# EAGLE board panelizada (EAGLE 7.2.0)
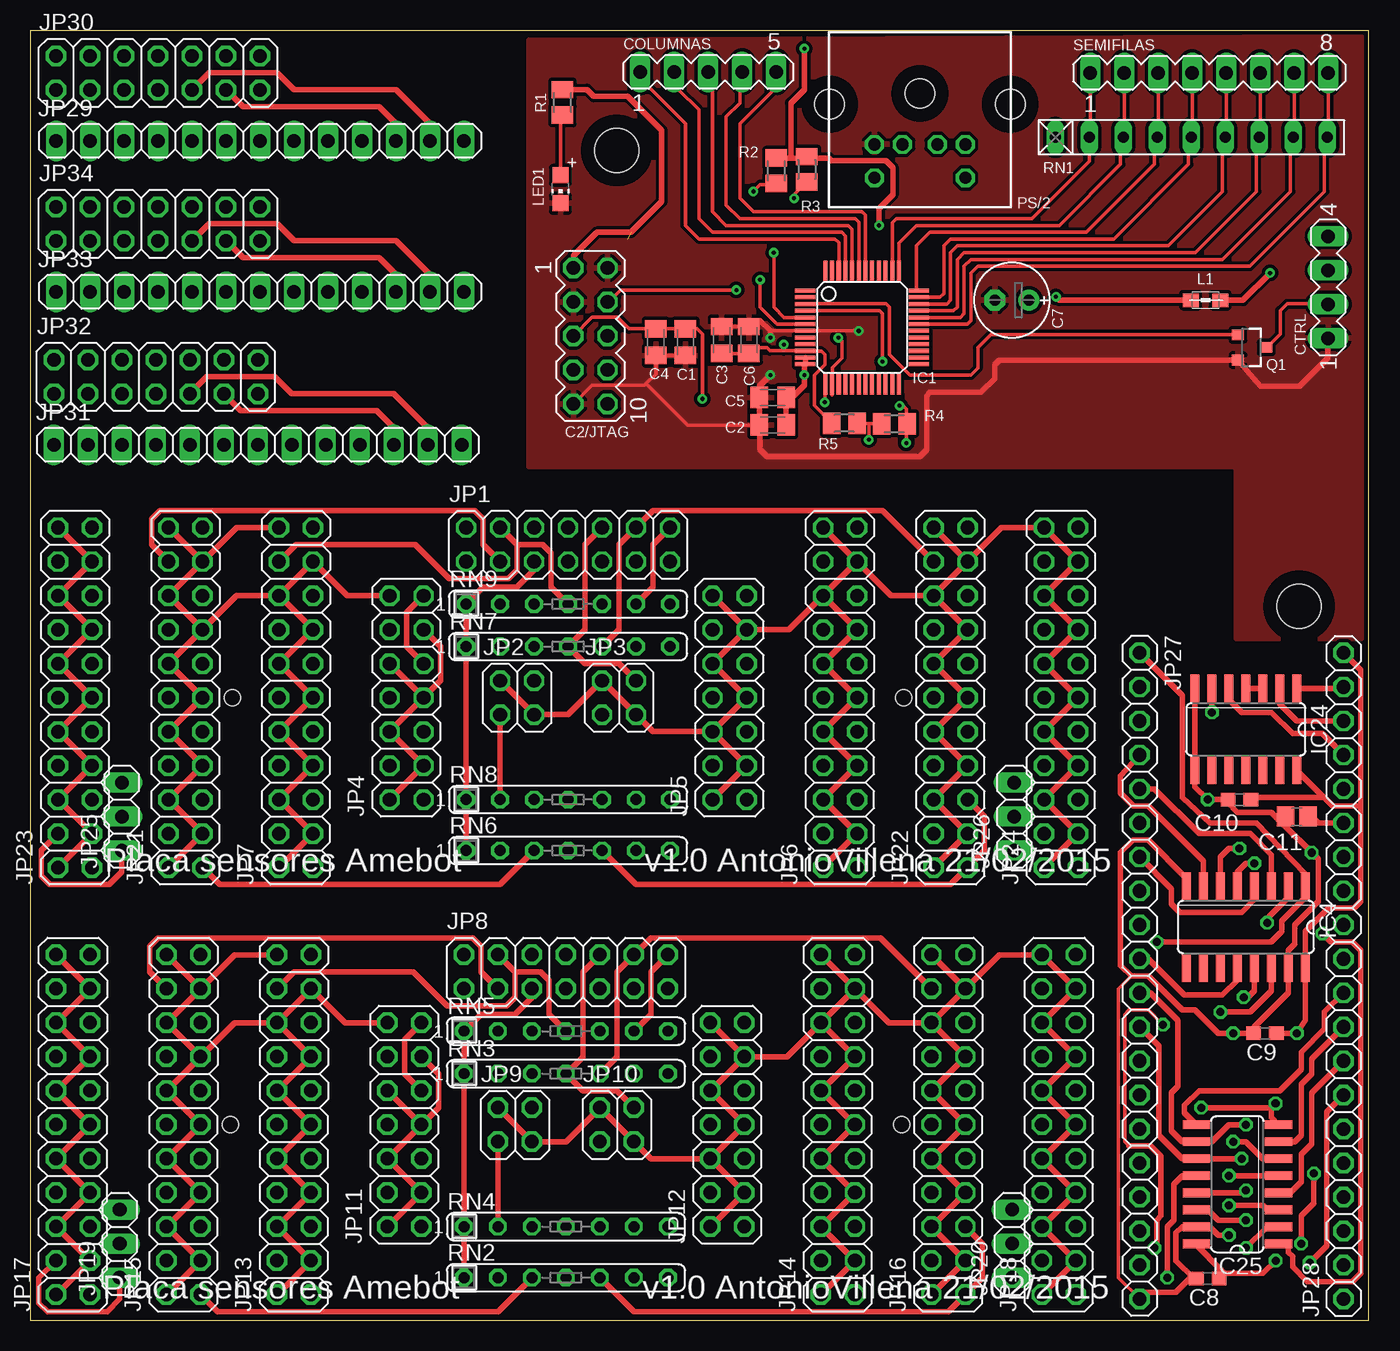
[diagram p0: board, top side]
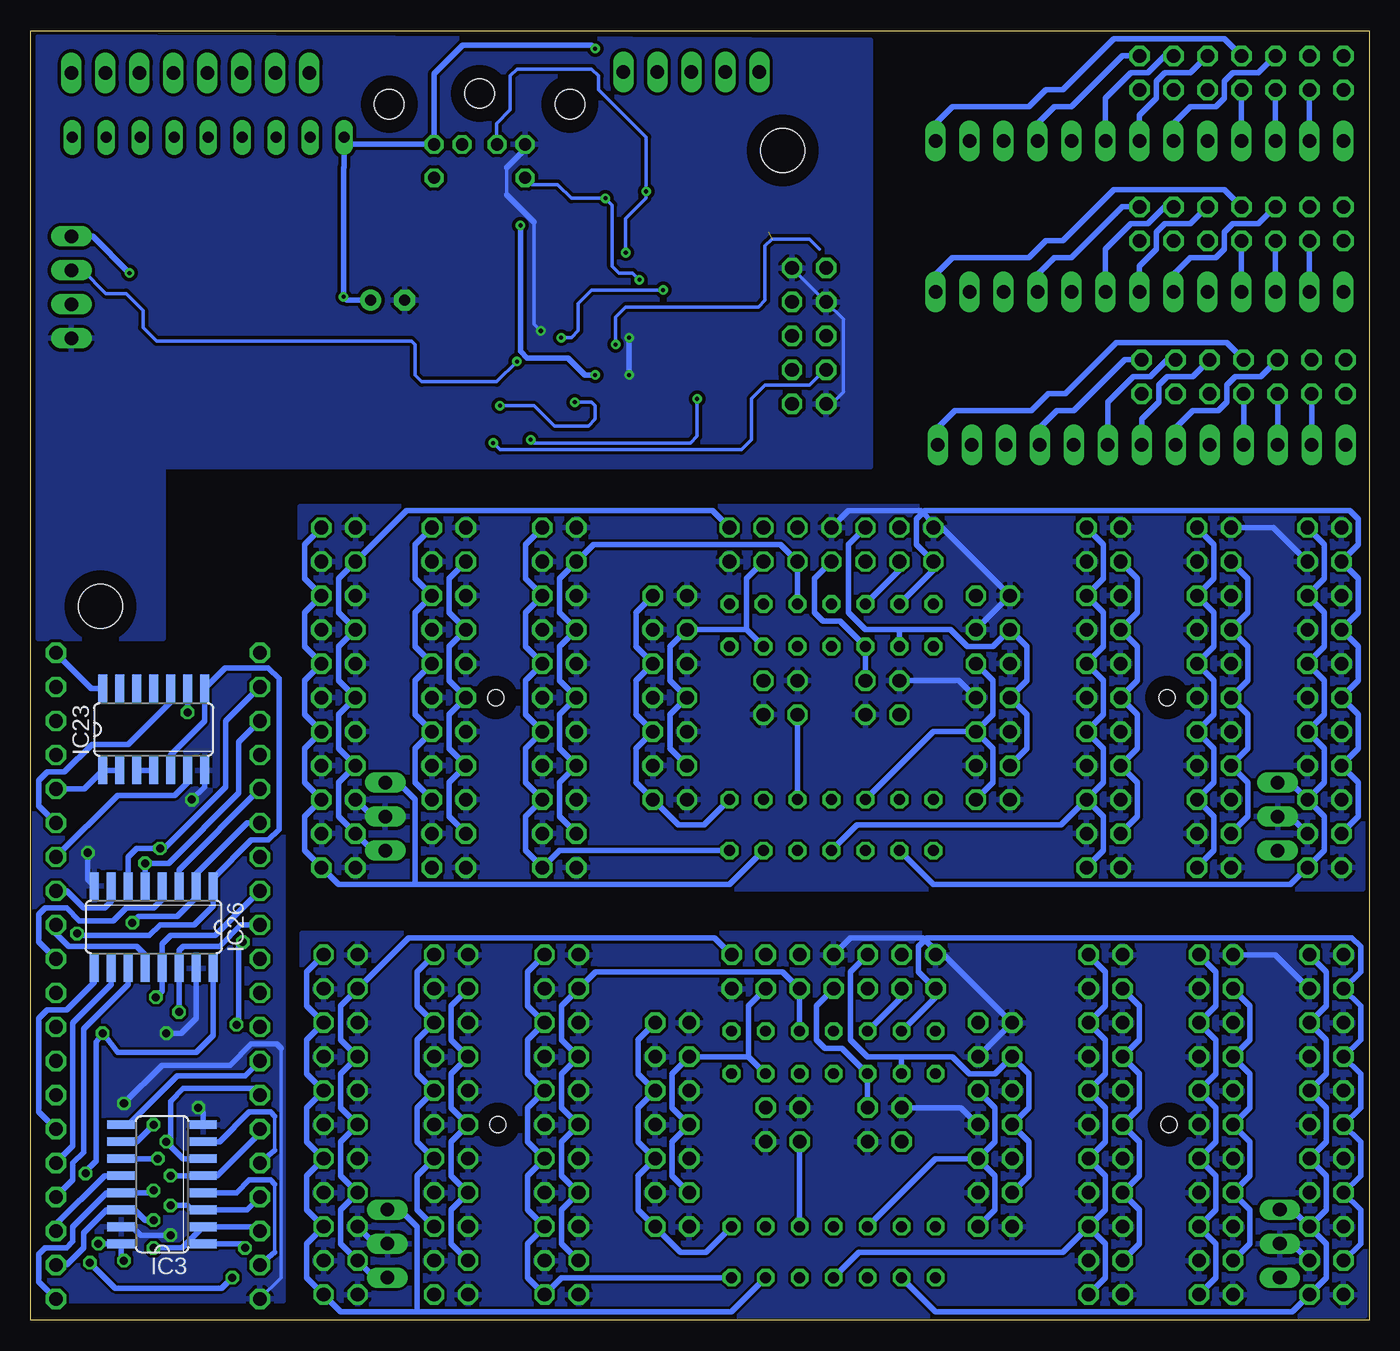
[diagram p1: board, bottom side, seen from below]

No outline drawn. Coordinates in mm, seen from the top.
Copper layers (1*16): Top 0.035mm / dielectric 1.5mm / Bottom 0.035mm
Design rules "default": minimum track width 10mil, minimum drill 24mil, track to track 8mil, track to pad 8mil, pad to pad 8mil, via to via 8mil, smd to smd 8mil, copper to edge 40mil, drill to drill 8mil, minimum pad ring 10mil, minimum via ring 8mil, stop-mask expansion 4mil, vias tented up to drill 0mil, thermal gap 10mil
Net classes: 1 power: width 0.508 mm, clearance 0.254 mm to class 0, clearance 0.254 mm
Holes 3.3 mm at 43.8,87.4 94.77,53.34
Holes 1.2 mm at 14.92,14.61 65.09,14.61 15.08,46.51 65.25,46.51
Milling: 4 lines

## Footprints (pad centres in the part's own frame; a part is rotated, then mirrored left to right if it is on the bottom)
C0805K = smd 1.3 x 1.6: 1 -1,0; 2 1,0
MA05-2 = drill 1.016 octagon: 1 -5.08,-1.27; 2 -5.08,1.27; 3 -2.54,-1.27; 4 -2.54,1.27; 5 0,-1.27; 6 0,1.27; 7 2.54,-1.27; 8 2.54,1.27; 9 5.08,-1.27; 10 5.08,1.27
E2,5-6E = drill 0.813 pad 1.575: + -1.27,0 | drill 0.813 pad 1.575 octagon: - 1.27,0
C0603 = smd 1.1 x 1: 1 -0.85,0; 2 0.85,0
C0805 = smd 1.3 x 1.5: 1 -0.85,0; 2 0.85,0
MA05-1 = drill 1.016 long: 1 -5.08,0; 2 -2.54,0; 3 0,0; 4 2.54,0; 5 5.08,0
MA04-1 = drill 1.016 long: 1 -3.81,0; 2 -1.27,0; 3 1.27,0; 4 3.81,0
TQFP48 = smd 0.3 x 1.5: 1 -2.75,-4.25; 2 -2.25,-4.25; 3 -1.75,-4.25; 4 -1.25,-4.25; 5 -0.75,-4.25; 6 -0.25,-4.25; 7 0.25,-4.25; 8 0.75,-4.25; 9 1.25,-4.25; 10 1.75,-4.25; 11 2.25,-4.25; 12 2.75,-4.25; 25 2.75,4.25; 26 2.25,4.25; 27 1.75,4.25; 28 1.25,4.25; 29 0.75,4.25; 30 0.25,4.25; 31 -0.25,4.25; 32 -0.75,4.25; 33 -1.25,4.25; 34 -1.75,4.25; 35 -2.25,4.25; 36 -2.75,4.25 | smd 1.5 x 0.3: 13 4.25,-2.75; 14 4.25,-2.25; 15 4.25,-1.75; 16 4.25,-1.25; 17 4.25,-0.75; 18 4.25,-0.25; 19 4.25,0.25; 20 4.25,0.75; 21 4.25,1.25; 22 4.25,1.75; 23 4.25,2.25; 24 4.25,2.75; 37 -4.25,2.75; 38 -4.25,2.25; 39 -4.25,1.75; 40 -4.25,1.25; 41 -4.25,0.75; 42 -4.25,0.25; 43 -4.25,-0.25; 44 -4.25,-0.75; 45 -4.25,-1.25; 46 -4.25,-1.75; 47 -4.25,-2.25; 48 -4.25,-2.75
SO16 = smd 0.66 x 2.032: 1 -4.445,-3.073; 2 -3.175,-3.073; 3 -1.905,-3.073; 4 -0.635,-3.073; 5 0.635,-3.073; 6 1.905,-3.073; 7 3.175,-3.073; 8 4.445,-3.073; 9 4.445,3.073; 10 3.175,3.073; 11 1.905,3.073; 12 0.635,3.073; 13 -0.635,3.073; 14 -1.905,3.073; 15 -3.175,3.073; 16 -4.445,3.073
SO14 = smd 0.66 x 2.032: 1 -3.81,-3.073; 2 -2.54,-3.073; 3 -1.27,-3.073; 4 0,-3.073; 5 1.27,-3.073; 6 2.54,-3.073; 7 3.81,-3.073; 8 3.81,3.073; 9 2.54,3.073; 10 1.27,3.073; 11 0,3.073; 12 -1.27,3.073; 13 -2.54,3.073; 14 -3.81,3.073
2X07 = drill 1.016 octagon: 1 -7.62,-1.27; 2 -7.62,1.27; 3 -5.08,-1.27; 4 -5.08,1.27; 5 -2.54,-1.27; 6 -2.54,1.27; 7 0,-1.27; 8 0,1.27; 9 2.54,-1.27; 10 2.54,1.27; 11 5.08,-1.27; 12 5.08,1.27; 13 7.62,-1.27; 14 7.62,1.27
2X02 = drill 1.016 octagon: 1 -1.27,-1.27; 2 -1.27,1.27; 3 1.27,-1.27; 4 1.27,1.27
2X11 = drill 1.016 octagon: 1 -12.7,-1.27; 2 -12.7,1.27; 3 -10.16,-1.27; 4 -10.16,1.27; 5 -7.62,-1.27; 6 -7.62,1.27; 7 -5.08,-1.27; 8 -5.08,1.27; 9 -2.54,-1.27; 10 -2.54,1.27; 11 0,-1.27; 12 0,1.27; 13 2.54,-1.27; 14 2.54,1.27; 15 5.08,-1.27; 16 5.08,1.27; 17 7.62,-1.27; 18 7.62,1.27; 19 10.16,-1.27; 20 10.16,1.27; 21 12.7,-1.27; 22 12.7,1.27
1X03 = drill 1.016 long: 1 -2.54,0; 2 0,0; 3 2.54,0
1X20 = drill 1.016 octagon: 1 -24.13,0; 2 -21.59,0; 3 -19.05,0; 4 -16.51,0; 5 -13.97,0; 6 -11.43,0; 7 -8.89,0; 8 -6.35,0; 9 -3.81,0; 10 -1.27,0; 11 1.27,0; 12 3.81,0; 13 6.35,0; 14 8.89,0; 15 11.43,0; 16 13.97,0; 17 16.51,0; 18 19.05,0; 19 21.59,0; 20 24.13,0
1X13 = drill 1.016 long: 1 -15.24,0; 2 -12.7,0; 3 -10.16,0; 4 -7.62,0; 5 -5.08,0; 6 -2.54,0; 7 0,0; 8 2.54,0; 9 5.08,0; 10 7.62,0; 11 10.16,0; 12 12.7,0; 13 15.24,0
0805 = smd 1.2 x 1: 1 -1.1,0; 2 1.1,0
CHIP-LED0805 = smd 1.2 x 1.2: A 0,-1.05; C 0,1.05
SSV-BC06 = drill 0.9 octagon: 1 1.3,8.5; 2 -1.3,8.5; 3 3.4,8.5; 4 -3.4,8.5; 5 3.4,11; 6 -3.4,11 | hole 2.2: -6.75,5.5; 0,4.7; 6.75,5.5
SOT23-3 = smd 0.8 x 0.9: 1 -0.95,-1; 2 0.95,-1; 3 0,1.1
M0805 = smd 1.3 x 1.6: 1 -0.95,0; 2 0.95,0
RN-9 = drill 0.813 long: 1 -10.16,0; 2 -7.62,0; 3 -5.08,0; 4 -2.54,0; 5 0,0; 6 2.54,0; 7 5.08,0; 8 7.62,0; 9 10.16,0
SIL7 = drill 0.813 octagon: 1 -7.62,0; 2 -5.08,0; 3 -2.54,0; 4 0,0; 5 2.54,0; 6 5.08,0; 7 7.62,0
MA08-1 = drill 1.016 long: 1 -8.89,0; 2 -6.35,0; 3 -3.81,0; 4 -1.27,0; 5 1.27,0; 6 3.81,0; 7 6.35,0; 8 8.89,0

## Placement (x,y rotation side)
C1  100nF  [C0805K]  48.93,73.08 270 top
C2  100nF  [C0805K]  55.45,66.88 180 top
C2/JTAG  [MA05-2]  41.84,73.54 270 top
C3  100nF  [C0805K]  51.64,73.23 90 top
C4  1uF  [C0805K]  46.72,73.08 270 top
C5  1uF  [C0805K]  55.45,68.94 180 top
C6  1uF  [C0805K]  53.68,73.23 90 top
C7  100uF  [E2,5-6E]  73.31,76.2 180 top
C8  [C0603]  87.95,3.11 180 top
C9  [C0603]  92.23,21.43 180 top
C10  100n  [C0603]  90.33,38.89 180 top
C11  [C0805]  94.61,37.62 180 top
COLUMNAS  [MA05-1]  50.63,93.27 0 top
CTRL  [MA04-1]  96.96,77.17 90 top
IC1  C8051F340  [TQFP48]  62.13,74.17 270 top
IC3  74*157  [SO16]  90.17,10.16 90 bottom
IC4  74*157  [SO16]  90.81,29.37 180 top
IC23  74LS32D  [SO14]  90.81,44.13 0 bottom
IC24  74LS00D  [SO14]  90.81,44.13 180 top
IC25  74*157  [SO16]  90.17,10.16 90 top
IC26  74*157  [SO16]  90.81,29.37 180 bottom
JP1  [2X07]  40.16,57.94 0 top
JP2  [2X02]  36.35,46.51 0 top
JP3  [2X02]  43.97,46.51 0 top
JP4  [2X07]  28.1,46.51 90 top
JP5  [2X07]  52.23,46.51 90 top
JP6  [2X11]  60.48,46.51 90 top
JP7  [2X11]  19.84,46.51 90 top
JP8  [2X07]  40.01,26.04 0 top
JP9  [2X02]  36.2,14.61 0 top
JP10  [2X02]  43.81,14.61 0 top
JP11  [2X07]  27.94,14.61 90 top
JP12  [2X07]  52.07,14.61 90 top
JP13  [2X11]  19.68,14.61 90 top
JP14  [2X11]  60.33,14.61 90 top
JP15  [2X11]  11.43,14.61 90 top
JP16  [2X11]  68.58,14.61 90 top
JP17  [2X11]  3.17,14.61 90 top
JP18  [2X11]  76.83,14.61 90 top
JP19  [1X03]  6.67,5.71 90 top
JP20  [1X03]  73.34,5.71 90 top
JP21  [2X11]  11.59,46.51 90 top
JP22  [2X11]  68.74,46.51 90 top
JP23  [2X11]  3.33,46.51 90 top
JP24  [2X11]  76.99,46.51 90 top
JP25  [1X03]  6.83,37.62 90 top
JP26  [1X03]  73.5,37.62 90 top
JP27  [1X20]  82.87,25.72 270 top
JP28  [1X20]  98.11,25.72 90 top
JP29  [1X13]  17.14,88.11 0 top
JP30  [2X07]  9.53,93.19 0 top
JP31  [1X13]  16.99,65.41 0 top
JP32  [2X07]  9.37,70.48 0 top
JP33  [1X13]  17.14,76.83 0 top
JP34  [2X07]  9.53,81.92 0 top
L1  [0805]  87.79,76.2 180 top
LED1  [CHIP-LED0805]  39.59,84.49 180 top
PS/2  [SSV-BC06]  66.45,96.34 180 top
Q1  2N2222  [SOT23-3]  91.22,72.67 270 top
R1  470  [M0805]  39.74,90.98 270 top
R2  10K  [M0805]  55.72,85.87 90 top
R3  10K  [M0805]  58.01,85.98 90 top
R4  1K  [M0805]  64.55,66.98 180 top
R5  1K  [M0805]  60.81,67.02 0 top
RN1  [RN-9]  86.74,88.37 0 top
RN2  [SIL7]  40.01,3.17 0 top
RN3  [SIL7]  40.01,18.41 0 top
RN4  [SIL7]  40.01,6.99 0 top
RN5  [SIL7]  40.01,21.59 0 top
RN6  [SIL7]  40.16,35.08 0 top
RN7  [SIL7]  40.16,50.32 0 top
RN8  [SIL7]  40.16,38.89 0 top
RN9  [SIL7]  40.16,53.5 0 top
SEMIFILAS  [MA08-1]  88.07,93.19 0 top

## Library data of the parts
C1-C11 R1-R5 = rcl
C2/JTAG COLUMNAS CTRL SEMIFILAS = con-lstb
IC1 = silabs-2
IC3 IC4 IC23-IC26 = 74xx-eu
JP1-JP34 = pinhead
L1 = wuerth-elektronik
LED1 = adafruit
PS/2 = con-yamaichi
Q1 = SparkFun
RN1 = resistor-net
RN2-RN9 = resistor-sil; OC_FARNELL: unknown; OC_NEWARK: unknown

## Nets
3.3V: JP8.5 RN2.1 RN3.1 RN4.1 RN5.1
3.3V1: JP1.5 RN6.1 RN7.1 RN8.1 RN9.1
3A: IC26.11 JP28.4
3B: IC26.10 JP28.5
5VDC [power]: C2.1 C5.1 C7.+ IC1.11 IC1.12 L1.2 PS/2.4 R2.2 R3.2 RN1.1
A0: IC4.6 IC26.6 JP27.2
A1: IC4.3 IC26.3 JP27.5
A2: IC4.13 IC26.13 JP27.8
A3: IC3.10 IC25.10 JP27.11
A4: IC3.6 IC25.6 JP27.14
A5: IC3.3 IC25.3 JP27.17
A6: IC3.13 IC25.13 JP28.1
A7: IC4.5 IC26.5 JP27.3
A8: IC4.2 IC26.2 JP27.6
A9: IC4.14 IC26.14 JP27.9
A10: IC3.11 IC25.11 JP27.12
A11: IC3.5 IC25.5 JP27.15
A12: IC3.2 IC25.2 JP27.18
A13: IC3.14 IC25.14 JP28.2
A15: IC24.5 JP28.17
CASL: IC23.6 JP28.14
D0: COLUMNAS.1 IC1.46
D1: COLUMNAS.2 IC1.45
D2: COLUMNAS.3 IC1.44
D3: COLUMNAS.4 IC1.43
D4: COLUMNAS.5 IC1.42
DMA0: IC4.7 JP27.4
DMA1: IC4.4 JP27.7
DMA2: IC4.12 JP27.10
DMA3: IC3.9 JP27.13
DMA4: IC3.7 JP27.16
DMA5: IC3.4 JP27.19
DMA6: IC3.12 JP28.3
DRASLL: IC3.1 IC4.1 JP27.1
GND: JP1.2 JP1.8 JP1.13 JP2.2 JP2.3 JP3.2 JP3.3 JP4.2 JP4.3 JP4.6 JP4.7 JP4.10 JP4.11 JP4.14 JP5.2 JP5.3 JP5.6 JP5.7 JP5.10 JP5.11 JP5.14 JP6.2 JP6.3 JP6.6 JP6.7 JP6.10 JP6.11 JP6.14 JP6.15 JP6.18 JP6.19 JP6.22 JP7.2 JP7.3 JP7.6 JP7.7 JP7.10 JP7.11 JP7.14 JP7.15 JP7.18 JP7.19 JP7.22 JP21.2 JP21.3 JP21.6 JP21.7 JP21.10 JP21.11 JP21.14 JP21.15 JP21.18 JP21.19 JP21.22 JP22.2 JP22.3 JP22.6 JP22.7 JP22.10 JP22.11 JP22.14 JP22.15 JP22.18 JP22.19 JP22.22 JP23.2 JP23.3 JP23.6 JP23.7 JP23.10 JP23.11 JP23.14 JP23.15 JP23.18 JP23.19 JP23.22 JP24.2 JP24.3 JP24.6 JP24.7 JP24.10 JP24.11 JP24.14 JP24.15 JP24.18 JP24.19 JP24.22 JP25.2 JP26.2
GND1 [power]: C1.2 C2.2 C2/JTAG.2 C2/JTAG.3 C2/JTAG.9 C3.2 C4.2 C5.2 C6.2 C7.- CTRL.1 IC1.7 LED1.C PS/2.3 Q1.2
GND2: JP8.2 JP8.8 JP8.13 JP9.2 JP9.3 JP10.2 JP10.3 JP11.2 JP11.3 JP11.6 JP11.7 JP11.10 JP11.11 JP11.14 JP12.2 JP12.3 JP12.6 JP12.7 JP12.10 JP12.11 JP12.14 JP13.2 JP13.3 JP13.6 JP13.7 JP13.10 JP13.11 JP13.14 JP13.15 JP13.18 JP13.19 JP13.22 JP14.2 JP14.3 JP14.6 JP14.7 JP14.10 JP14.11 JP14.14 JP14.15 JP14.18 JP14.19 JP14.22 JP15.2 JP15.3 JP15.6 JP15.7 JP15.10 JP15.11 JP15.14 JP15.15 JP15.18 JP15.19 JP15.22 JP16.2 JP16.3 JP16.6 JP16.7 JP16.10 JP16.11 JP16.14 JP16.15 JP16.18 JP16.19 JP16.22 JP17.2 JP17.3 JP17.6 JP17.7 JP17.10 JP17.11 JP17.14 JP17.15 JP17.18 JP17.19 JP17.22 JP18.2 JP18.3 JP18.6 JP18.7 JP18.10 JP18.11 JP18.14 JP18.15 JP18.18 JP18.19 JP18.22 JP19.2 JP20.2
GND3: C8.2 C9.2 C10.2 C11.2 IC3.8 IC3.15 IC4.8 IC4.15 IC23.7 IC24.7 IC25.8 IC25.15 IC26.8 IC26.15 JP27.20
IORQULA: CTRL.3 IC1.4
KBD_CLK: IC1.6 PS/2.5 R3.1
KBD_DATA: IC1.5 PS/2.1 R2.1
MA0: IC26.7 JP28.13
MA1: IC26.12 JP28.12
MA2: IC26.4 JP28.11
MA3: IC25.9 JP28.10
MA4: IC25.7 JP28.9
MA5: IC25.4 JP28.8
MA6: IC25.12 JP28.7
MA7: IC26.9 JP28.6
MREQ: IC23.1 IC23.2 JP28.16
MREQDL: C11.1 IC23.10 JP28.15
N$1: JP22.1 JP22.5 JP22.9 JP22.13 JP22.17 JP22.21 RN6.5
N$2: JP2.1 RN8.2
N$3: JP7.1 JP7.5 JP7.9 JP7.13 JP7.17 JP7.21 RN6.4
N$4: JP4.1 JP4.5 JP4.9 JP4.13 RN8.3
N$5: JP5.1 JP5.5 JP5.9 JP5.13 RN8.7
N$6: JP3.1 RN8.5
N$7: JP6.1 JP6.5 JP6.9 JP6.13 JP6.17 JP6.21 RN6.7
N$8: JP24.1 JP24.5 JP24.9 JP24.13 JP24.17 JP24.21 JP26.3 RN6.6
N$9: JP23.1 JP23.5 JP23.9 JP23.13 JP23.17 JP23.21 JP25.3 RN6.2
N$10: JP21.1 JP21.5 JP21.9 JP21.13 JP21.17 JP21.21 RN6.3
N$11: IC24.3 IC24.4
N$12: IC23.9 IC24.6
N$13: IC23.3 IC23.4
N$14: IC23.5 IC23.8 IC25.1 IC26.1
N$15: JP29.2 JP30.3
N$16: JP29.3 JP30.5
N$17: JP29.4 JP30.7
N$18: C1.1 C2/JTAG.5 C4.1 R4.2 R5.2
N$19: LED1.A R1.2
N$20: C2/JTAG.7 IC1.13 R4.1
N$21: C2/JTAG.4 IC1.14
N$22: CTRL.2 Q1.3
N$23: CTRL.4 L1.1
N$24: JP13.1 JP13.5 JP13.9 JP13.13 JP13.17 JP13.21 RN2.4
N$25: JP15.1 JP15.5 JP15.9 JP15.13 JP15.17 JP15.21 RN2.3
N$26: JP17.1 JP17.5 JP17.9 JP17.13 JP17.17 JP17.21 JP19.3 RN2.2
N$27: JP16.1 JP16.5 JP16.9 JP16.13 JP16.17 JP16.21 RN2.5
N$28: JP9.1 RN4.2
N$29: JP11.1 JP11.5 JP11.9 JP11.13 RN4.3
N$30: JP12.1 JP12.5 JP12.9 JP12.13 RN4.7
N$31: JP10.1 RN4.5
N$32: JP14.1 JP14.5 JP14.9 JP14.13 JP14.17 JP14.21 RN2.7
N$33: JP18.1 JP18.5 JP18.9 JP18.13 JP18.17 JP18.21 JP20.3 RN2.6
N$34: JP29.12 JP30.9
N$35: JP29.11 JP30.11
N$36: JP29.10 JP30.14
N$37: JP29.8 JP30.12
N$38: JP29.6 JP30.6
N$39: JP29.7 JP30.10
N$40: JP29.13 JP30.8
N$41: JP31.2 JP32.3
N$42: JP31.3 JP32.5
N$43: JP31.4 JP32.7
N$44: JP31.12 JP32.9
N$45: JP31.11 JP32.11
N$46: JP31.10 JP32.14
N$47: JP31.8 JP32.12
N$48: JP31.6 JP32.6
N$49: JP31.7 JP32.10
N$50: JP31.13 JP32.8
N$51: JP33.2 JP34.3
N$52: JP33.3 JP34.5
N$53: JP33.4 JP34.7
N$54: JP33.12 JP34.9
N$55: JP33.11 JP34.11
N$56: JP33.10 JP34.14
N$57: JP33.8 JP34.12
N$58: JP33.6 JP34.6
N$59: JP33.7 JP34.10
N$60: JP33.13 JP34.8
RD: IC24.2 JP28.18
RESET: IC1.3 Q1.1
SEN1: JP8.1 JP17.4 JP17.8 JP17.12 JP17.16 JP17.20 JP19.1 RN5.2
SEN2: JP8.3 JP15.4 JP15.8 JP15.12 JP15.16 JP15.20 RN5.3
SEN3: JP8.7 JP9.4 RN3.3
SEN4: JP8.9 JP14.4 JP14.8 JP14.12 JP14.16 JP14.20 RN5.5
SEN5: JP8.11 JP12.4 JP12.8 JP12.12 RN3.6
SEN6: JP8.4 JP13.4 JP13.8 JP13.12 JP13.16 JP13.20 RN5.4
SEN7: JP8.6 JP11.4 JP11.8 JP11.12 RN3.2
SEN8: JP8.10 JP10.4 RN3.4
SEN9: JP8.12 JP16.4 JP16.8 JP16.12 JP16.16 JP16.20 RN3.5
SEN10: JP8.14 JP18.4 JP18.8 JP18.12 JP18.16 JP18.20 JP20.1 RN5.6
SEN11: JP1.1 JP23.4 JP23.8 JP23.12 JP23.16 JP23.20 JP25.1 RN9.2
SEN12: JP1.3 JP21.4 JP21.8 JP21.12 JP21.16 JP21.20 RN9.3
SEN13: JP1.4 JP7.4 JP7.8 JP7.12 JP7.16 JP7.20 RN9.4
SEN14: JP1.6 JP4.4 JP4.8 JP4.12 RN7.2
SEN15: JP1.10 JP3.4 RN7.4
SEN16: JP1.12 JP22.4 JP22.8 JP22.12 JP22.16 JP22.20 RN7.5
SEN17: JP1.14 JP24.4 JP24.8 JP24.12 JP24.16 JP24.20 JP26.1 RN9.6
SEN18: JP1.7 JP2.4 RN7.3
SEN19: JP1.9 JP6.4 JP6.8 JP6.12 JP6.16 JP6.20 RN9.5
SEN20: JP1.11 JP5.4 JP5.8 JP5.12 RN7.6
SF1: IC1.38 RN1.2 SEMIFILAS.1
SF2: IC1.37 RN1.3 SEMIFILAS.2
SF3: IC1.36 RN1.4 SEMIFILAS.3
SF4: IC1.35 RN1.5 SEMIFILAS.4
SF5: IC1.34 RN1.6 SEMIFILAS.5
SF6: IC1.33 RN1.7 SEMIFILAS.6
SF7: IC1.32 RN1.8 SEMIFILAS.7
SF8: IC1.31 RN1.9 SEMIFILAS.8
VCC: C8.1 C9.1 C10.1 IC3.16 IC4.16 IC23.14 IC24.14 IC25.16 IC26.16 JP28.20
VDD [power]: C2/JTAG.1 C3.1 C6.1 IC1.10 R1.1 R5.1
WR: IC24.1 JP28.19

## Tracks (layer width: path | path; a pad name or v marks a point on that pad's centre or on a via)
3.3V
  Top 0.406: JP8.5 37.47,24.13 36.2,22.86 33.66,22.86 RN5.1 RN3.1 RN4.1 RN2.1
3.3V1
  Top 0.406: JP1.5 37.62,56.04 36.35,54.77 33.81,54.77 RN9.1 RN7.1 RN8.1 RN6.1
3A
  Bottom 0.406: IC26.11 92.71,25.08 96.04,21.75 96.04,12.54 96.84,11.75 96.84,10.48 JP28.4
3B
  Bottom 0.406: IC26.10 93.98,25.08 96.84,22.23 96.84,13.02 JP28.5
5VDC  (via drill 0.3 pad 0.61)
  Top 0.254: 57.9,86.82 R3.2 | C5.1 56.9,68.94 | 57.82,71.35 IC1.12
  Top 0.406: R2.2 56.8,86.82 | 56.8,86.82 57.9,86.82 59.64,86.82 59.85,86.61 63.91,86.61 64.42,86.11 64.42,84.07 63.41,83.06 v63.41,81.79 | IC1.12 IC1.11 | C2.1 C5.1 | 56.9,68.94 57.82,69.85 v57.82,70.61 57.82,71.35 | v57.82,95 57.82,91.95 56.8,90.93 56.8,86.82 | L1.2 76.87,76.2 v76.61,76.45
  Bottom 0.254: 76.05,87.84 RN1.1
  Bottom 0.406: v57.82,95 58.07,95.25 67.72,95.25 69.85,93.12 PS/2.4 76.05,87.84 | RN1.1 76.58,86.14 76.61,86.11 v76.61,76.45 76.36,76.2 C7.+ | v63.41,81.79 63.41,72.39 62.9,71.88 59.85,71.88 58.58,70.61 v57.82,70.61
A0  (via drill 0.6)
  Top 0.406: v90.33,35.24 89.53,35.24 88.9,34.61 IC4.6
  Bottom 0.406: IC26.6 92.71,34.61 92.08,35.24 v90.33,35.24 90.01,35.24 85.41,39.85 85.41,44.77 JP27.2
A1
  Top 0.406: IC4.3 92.71,34.77 91.12,36.35 87.31,36.35 83.98,39.69 JP27.5
  Bottom 0.406: IC26.3 88.9,33.66 JP27.5
A2  (via drill 0.6)
  Top 0.406: v90.65,24.13 90.96,24.13 91.44,24.61 IC4.13
  Bottom 0.406: JP27.8 86.2,28.73 89.53,28.73 90.17,28.1 IC26.13 90.17,24.61 v90.65,24.13
A3  (via drill 0.6)
  Top 0.406: v90.81,14.61 89.53,14.61 88.27,13.34 IC25.10 86.04,13.34 85.25,14.13 85.25,16.99 85.72,17.46 85.72,22.38 83.66,24.45 JP27.11
  Bottom 0.406: v90.81,14.61 92.08,13.34 IC3.10
A4  (via drill 0.6)
  Top 0.406: v89.85,13.34 90.81,13.34 92.08,12.06 IC25.6
  Bottom 0.406: IC3.6 88.58,12.06 v89.85,13.34 89.53,13.65 89.53,16.35 88.58,17.3 83.34,17.3 JP27.14
A5  (via drill 0.6)
  Top 0.406: IC25.3 92.39,8.26 92.08,8.57 v89.53,8.57
  Bottom 0.406: v89.53,8.57 88.27,8.57 87.95,8.26 IC3.3 83.82,8.26 JP27.17
A6  (via drill 0.6)
  Top 0.406: IC25.13 90.65,9.53 v90.81,9.68
  Bottom 0.406: v90.81,9.68 90.96,9.53 IC3.13 94.3,9.53 96.84,6.99 96.84,5.87 97.31,5.4 98.9,5.4 99.38,4.92 99.38,2.86 JP28.1
A7  (via drill 0.6)
  Top 0.406: IC4.5 90.17,33.5 90.81,34.13 v91.44,34.13
  Bottom 0.406: JP27.3 84.45,43.18 84.45,39.37 89.69,34.13 v91.44,34.13 IC26.5
A8  (via drill 0.6)
  Top 0.406: IC4.2 93.98,31.59 92.55,30.16 92.55,29.84 v92.39,29.69
  Bottom 0.406: JP27.6 83.82,37.15 87.63,33.34 IC26.2 87.63,31.59 89.06,30.16 91.92,30.16 v92.39,29.69
A9  (via drill 0.6)
  Top 0.406: IC4.14 92.71,24.61 91.12,23.02 v88.9,23.02
  Bottom 0.406: v88.9,23.02 IC26.14 88.9,27.62 88.58,27.94 85.88,27.94 84.3,29.53 JP27.9
A10  (via drill 0.6)
  Top 0.406: v90.49,12.06 IC25.11 86.04,12.06 84.3,13.81 84.3,20.48 JP27.12
  Bottom 0.406: IC3.11 v90.49,12.06
A11  (via drill 0.6)
  Top 0.406: v89.53,10.79 IC25.5
  Bottom 0.406: v89.53,10.79 IC3.5 86.04,10.79 82.87,13.97 JP27.15
A12  (via drill 0.6)
  Top 0.406: IC25.2 92.39,6.99 v90.81,5.4
  Bottom 0.406: v90.81,5.4 88.68,5.4 IC3.2 83.19,6.99 JP27.18
A13  (via drill 0.6)
  Top 0.406: IC25.14 87.95,8.26 88.74,7.46 v90.81,7.46
  Bottom 0.406: v90.81,7.46 91.44,7.46 92.23,8.26 IC3.14 94.3,8.26 96.04,6.51 96.04,5.4 97.31,4.13 JP28.2
A15
  Top 0.406: JP28.17 96.52,43.81 94.3,43.81 92.71,45.4 90.49,45.4 89.53,46.35 IC24.5
CASL
  Bottom 0.406: JP28.14 93.5,39.21 89.22,39.21 88.27,40.16 IC23.6
D0
  Top 0.254: COLUMNAS.1 45.88,92.94 45.88,92.46 48.93,89.41 48.93,81.79 49.94,80.77 60.1,80.77 60.38,80.49 IC1.46
D1
  Top 0.254: COLUMNAS.2 48.42,92.94 48.42,91.95 49.94,90.42 49.94,82.3 50.96,81.28 60.61,81.28 60.88,81.01 IC1.45
D2
  Top 0.254: COLUMNAS.3 50.96,92.94 50.96,82.8 51.98,81.79 61.12,81.79 61.38,81.52 IC1.44
D3
  Top 0.254: COLUMNAS.4 52.99,93.09 52.99,90.93 51.98,89.92 51.98,83.31 52.99,82.3 61.63,82.3 61.88,82.04 IC1.43
D4
  Top 0.254: IC1.42 62.38,82.55 62.13,82.8 54.01,82.8 52.99,83.82 52.99,89.41 55.53,91.95 55.53,93.09 COLUMNAS.5
DMA0
  Top 0.406: JP27.4 81.44,40.64 81.44,39.37 82.39,38.42 83.5,38.42 87.63,34.29 IC4.7
DMA1
  Top 0.406: JP27.7 85.25,32.23 85.25,31.11 85.88,30.48 90.49,30.48 91.44,31.43 IC4.4
DMA2
  Top 0.406: JP27.10 83.5,26.99 86.2,24.29 89.06,24.29 90.17,25.4 IC4.12
DMA3
  Bottom 0.406: JP27.13 83.98,18.26 89.06,18.26 92.71,14.61 IC3.9
DMA4
  Bottom 0.254: 81.76,15.24 81.76,12.7
  Bottom 0.406: IC3.7 85.88,13.34 83.66,15.56 82.07,15.56 81.76,15.24 | 81.76,12.7 JP27.16
DMA5
  Bottom 0.254: 81.76,10.16 81.76,5.08
  Bottom 0.406: IC3.4 84.61,9.53 83.66,10.48 82.07,10.48 81.76,10.16 | 81.76,5.08 JP27.19
DMA6
  Bottom 0.406: JP28.3 98.11,7.14 94.46,10.79 IC3.12
DRASLL  (via drill 0.6)
  Top 0.254: 82.07,13.02 81.76,13.34 81.76,22.86 82.07,23.18 83.5,23.18 v84.61,22.07
  Top 0.406: JP27.1 86.04,46.67 86.04,39.05 88.11,37.15 91.6,37.15 95.25,33.34 IC4.1 95.25,31.59 93.5,29.84 93.5,29.05 92.71,28.26 v84.14,28.26 | 82.07,13.02 83.66,13.02 84.45,12.22 84.45,7.78 84.14,7.46 84.14,5.56 v83.98,5.4
  Bottom 0.406: IC3.1 84.3,5.71 v83.98,5.4 | v84.14,28.26 84.45,27.94 84.45,22.23 v84.61,22.07
GND
  Top 0.406: JP4.2 JP4.3 JP4.6 JP4.7 | JP4.7 JP4.10 | JP7.18 JP7.19 23.65,54.13 JP4.14 | JP7.18 JP7.15 JP7.14 JP7.11 JP7.10 JP7.7 JP7.6 JP7.3 JP7.2 | JP21.22 JP21.19 | JP21.19 JP21.18 JP21.15 | JP21.15 JP21.14 JP21.11 JP21.10 JP21.7 JP21.6 JP21.3 JP21.2 | JP7.22 15.4,59.21 JP21.19 | JP23.22 JP23.19 JP23.18 JP23.15 JP23.14 JP23.11 JP23.10 JP23.7 JP23.6 JP23.3 JP23.2 | JP2.2 JP2.3 40.16,45.24 JP3.2 JP3.3 46.51,43.97 JP5.6 | JP4.7 30.64,47.78 30.64,50.32 JP4.11 | JP5.14 JP5.11 | JP5.11 JP5.10 JP5.7 JP5.6 | JP5.6 JP5.3 JP5.2 | JP6.22 JP6.19 | JP6.19 JP6.18 | JP6.18 56.67,51.59 JP5.11 | JP6.18 JP6.15 JP6.14 JP6.11 JP6.10 JP6.7 JP6.6 JP6.3 JP6.2 | JP22.22 JP22.19 | JP22.19 JP22.18 | JP22.18 JP22.15 JP22.14 JP22.11 JP22.10 JP22.7 JP22.6 JP22.3 JP22.2 | JP22.19 72.55,59.21 JP24.22 JP24.19 JP24.18 JP24.15 JP24.14 JP24.11 JP24.10 JP24.7 JP24.6 JP24.3 JP24.2 | JP7.18 15.4,54.13 JP21.15 | JP22.18 64.29,54.13 JP6.19
  Bottom 0.406: JP21.22 7.14,59.21 JP23.19 | JP4.11 JP4.14 31.91,59.21 JP1.2 32.54,59.53 33.5,60.48 38.89,60.48 JP1.8 | JP2.2 30.64,47.78 JP4.7 | JP25.2 5.87,37.62 JP23.3 | JP26.2 74.45,37.62 JP24.6
  pour Bottom: 0.48,60.8 79.85,60.8 79.85,32.23 0.48,32.23
GND1  (via drill 0.3 pad 0.61)
  Top 0.254: C3.2 C6.2 53.74,74.68 54.52,74.68 | C1.2 C4.2 46.72,70.69 46.01,69.98 | 46.01,69.98 45.88,69.85 41.96,69.85 C2/JTAG.9 | 55.28,73.91 55.27,73.92 IC1.7 v61.88,73.91 | 46.01,69.98 49.1,66.88 C2.2 54.52,66.82
  Top 0.406: CTRL.1 96.93,71.88 94.85,69.8 91.88,69.8 Q1.2 72.39,71.72 72.04,71.37 72.04,70.36 71.03,69.34 67.22,69.34 66.96,69.09 66.96,65.02 66.45,64.52 55.02,64.52 54.52,65.02 54.52,66.82 | 55.27,73.92 54.52,74.68 | C2.2 C5.2 54.45,69.79 v55.28,70.61 | v55.28,73.41 55.28,73.91
  Bottom 0.254: C2/JTAG.2 C2/JTAG.3 39.27,74.78 39.27,69.34 40.16,68.46 C2/JTAG.9 | 64.42,86.11 64.42,84.07 | 62.39,82.04 62.39,74.42 v61.88,73.91
  Bottom 0.406: v55.28,70.61 v55.28,73.41 | PS/2.3 63.05,87.47 64.42,86.11 | 64.42,84.07 62.39,82.04
  pour Top: 99.44,50.93 90.07,50.93 90.07,63.75 37.24,63.75 37.24,95.63 99.44,95.89
  pour Bottom: 99.44,50.93 90.07,50.93 90.07,63.75 37.24,63.75 37.24,95.63 99.44,95.89
GND2
  Top 0.406: JP11.2 JP11.3 JP11.6 JP11.7 | JP11.7 JP11.10 | JP13.18 JP13.19 23.5,22.23 JP11.14 | JP13.18 JP13.15 JP13.14 JP13.11 JP13.10 JP13.7 JP13.6 JP13.3 JP13.2 | JP15.22 JP15.19 | JP15.19 JP15.18 JP15.15 | JP15.15 JP15.14 JP15.11 JP15.10 JP15.7 JP15.6 JP15.3 JP15.2 | JP13.22 15.24,27.3 JP15.19 | JP17.22 JP17.19 JP17.18 JP17.15 JP17.14 JP17.11 JP17.10 JP17.7 JP17.6 JP17.3 JP17.2 | JP9.2 JP9.3 40.01,13.34 JP10.2 JP10.3 46.35,12.06 JP12.6 | JP11.7 30.48,15.88 30.48,18.41 JP11.11 | JP12.14 JP12.11 | JP12.11 JP12.10 JP12.7 JP12.6 | JP12.6 JP12.3 JP12.2 | JP14.22 JP14.19 | JP14.19 JP14.18 | JP14.18 56.52,19.68 JP12.11 | JP14.18 JP14.15 JP14.14 JP14.11 JP14.10 JP14.7 JP14.6 JP14.3 JP14.2 | JP16.22 JP16.19 | JP16.19 JP16.18 | JP16.18 JP16.15 JP16.14 JP16.11 JP16.10 JP16.7 JP16.6 JP16.3 JP16.2 | JP16.19 72.39,27.3 JP18.22 JP18.19 JP18.18 JP18.15 JP18.14 JP18.11 JP18.10 JP18.7 JP18.6 JP18.3 JP18.2 | JP13.18 15.24,22.23 JP15.15 | JP16.18 64.14,22.23 JP14.19
  Bottom 0.406: JP15.22 6.99,27.3 JP17.19 | JP11.11 JP11.14 31.75,27.3 JP8.2 32.38,27.62 33.34,28.57 38.73,28.57 JP8.8 | JP9.2 30.48,15.88 JP11.7 | JP19.2 5.71,5.71 JP17.3 | JP20.2 74.3,5.71 JP18.6
  pour Bottom: 0.32,28.89 79.69,28.89 79.69,0.32 0.32,0.32
GND3  (via drill 0.6, 0.61)
  Top 0.254: 82.23,25.72 81.28,24.77 81.28,3.17 JP27.20
  Top 0.406: v89.53,6.35 88.74,6.35 88.11,6.99 IC25.15 86.04,6.99 85.57,6.51 85.57,4.45 86.9,3.11 C8.2 86.61,3.11 85.57,2.06 83.34,2.06 JP27.20 | C11.2 93.77,36.89 | 93.77,36.89 v95.73,34.92 96.2,34.45 96.2,31.27 94.46,29.53 94.46,28.1 93.98,27.62 IC4.15 93.98,24.45 91.44,21.91 91.44,21.49 C9.2 v89.85,21.43 88.74,21.43 87,23.18 86.04,23.18 83.5,25.72 82.23,25.72 81.44,26.51 81.44,34.92 82.39,35.88 83.5,35.88 86.36,33.02 IC4.8 | IC24.7 87,39.85 v87.95,38.89 C10.2 89.48,38.63 90.17,37.94 92.71,37.94 93.77,36.89 | v87.47,15.88 92.71,15.88 | 92.71,15.88 v93.03,16.19 | 92.71,15.88 92.71,15.14 IC25.8
  Bottom 0.254: 81.28,20.32 81.28,3.17 JP27.20
  Bottom 0.406: v89.53,6.35 91.76,6.35 92.39,6.99 IC3.15 | IC3.8 87.1,15.5 v87.47,15.88 | v95.73,34.92 95.73,32.92 IC26.8 | v87.95,38.89 87,39.85 IC23.7 | v93.03,16.19 90.17,19.05 85.09,19.05 83.5,20.64 81.6,20.64 81.28,20.32 | IC26.15 87.63,22.54 88.74,21.43 v89.85,21.43
  pour Bottom: 81.12,1.43 81.12,50.16 99.69,50.16 99.69,1.43 81.28,1.43
IORQULA  (via drill 0.3 pad 0.61)
  Top 0.254: IC1.4 63.42,75.42 63.66,75.18 v63.66,71.63
  Bottom 0.254: v63.66,71.63 65.18,70.1 70.77,70.1 71.28,70.61 71.28,72.9 71.53,73.15 90.58,73.15 91.6,74.17 91.6,75.44 92.87,76.71 94.39,76.71 96.12,78.44 CTRL.3 96.91,78.49
KBD_CLK  (via drill 0.3 pad 0.61)
  Top 0.254: 58.2,84.84 R3.1 57.05,84.07 v57.05,83.82 | IC1.6 55.79,74.42 54.52,75.69 v54.52,77.72
  Bottom 0.254: v54.52,77.72 55.02,78.23 56.04,78.23 56.55,78.74 56.55,83.31 v57.05,83.82 59.59,83.82 60.61,84.84 62.55,84.84 PS/2.5
KBD_DATA  (via drill 0.3 pad 0.61)
  Top 0.254: IC1.5 56.3,74.92 55.53,75.69 v55.53,79.76 | v54.01,84.33 54.52,84.84 55.63,84.84 R2.1
  Bottom 0.254: v55.53,79.76 55.53,82.3 54.01,83.82 v54.01,84.33 54.01,88.39 57.56,91.95 57.56,92.96 58.07,93.47 63.66,93.47 64.17,92.96 64.17,90.42 65.18,89.41 65.18,87.87 PS/2.1
MA0
  Bottom 0.406: JP28.13 97.31,32.07 96.04,30.8 94.46,30.8 93.98,31.27 IC26.7
MA1
  Bottom 0.406: IC26.12 91.44,27.3 92.08,27.94 97.16,27.94 98.11,28.89 JP28.12
MA2
  Bottom 0.406: JP28.11 99.38,28.26 99.38,30.32 98.9,30.8 97.31,30.8 96.36,29.84 93.82,29.84 92.87,30.8 90.81,30.8 90.17,31.43 IC26.4
MA3
  Top 0.406: JP28.10 96.68,23.02 96.68,21.75 94.93,20 94.93,18.73 93.34,17.14 87.31,17.14 86.2,16.03 86.2,15.5 IC25.9
MA4
  Top 0.406: JP28.9 95.73,19.53 95.73,18.41 94.93,17.62 94.93,13.81 94.46,13.34 IC25.7
MA5
  Top 0.406: IC25.4 94.14,9.53 94.93,10.32 94.93,12.38 95.73,13.18 95.73,16.99 JP28.8
MA6  (via drill 0.6)
  Top 0.406: v95.57,4.29 96.84,5.56 96.84,15.56 JP28.7 | v84.93,3.17 84.93,6.99 85.41,7.46 85.41,10.16 86.04,10.79 IC25.12
  Bottom 0.406: v95.57,4.29 93.66,2.38 85.72,2.38 v84.93,3.17
MA7
  Bottom 0.406: IC26.9 95.25,25.24 97.31,23.18 98.74,23.18 99.38,22.54 99.38,15.56 JP28.6
MREQ
  Bottom 0.406: IC23.2 IC23.1 95.99,39.69 JP28.16
MREQDL
  Top 0.406: C11.1 95.73,37.62 96.2,37.15 JP28.15
  Bottom 0.406: IC23.10 89.53,46.2 92.71,43.02 95.41,43.02 97.47,40.96 98.74,40.96 99.38,40.32 99.38,38.42 JP28.15
N$1
  Top 0.406: RN6.5 45.24,32.54 68.74,32.54 JP22.1 71.28,35.08 71.28,37.62 JP22.5
  Bottom 0.406: JP22.21 71.28,57.94 71.28,55.4 JP22.17 71.28,52.86 71.28,50.32 JP22.13 71.28,47.78 71.28,45.24 JP22.9 71.28,42.7 71.28,40.16 JP22.5
N$2
  Top 0.406: JP2.1 RN8.2
N$3
  Bottom 0.406: JP7.21 19.84,57.94 19.84,55.4 JP7.17 19.84,52.86 19.84,50.32 JP7.13 19.84,47.78 19.84,45.24 JP7.9 19.84,42.7 19.84,40.16 JP7.5 | JP7.5 19.84,37.62 19.84,35.08 JP7.1 | RN6.4 38.26,36.99 23.02,36.99 JP7.5
N$4
  Top 0.406: JP4.13 28.1,52.86 28.1,50.32 JP4.9
  Bottom 0.406: JP4.9 28.1,47.78 28.1,45.24 JP4.5 | JP4.5 28.1,42.7 28.1,40.16 JP4.1 | RN8.3 32.54,43.97 JP4.5
N$5
  Bottom 0.406: JP5.13 54.77,52.86 54.77,50.32 JP5.9 54.77,47.78 54.77,45.24 JP5.5 54.77,42.7 54.77,40.16 JP5.1 51.59,36.99 49.69,36.99 RN8.7
N$6
  Bottom 0.406: JP3.1 RN8.5
N$7
  Bottom 0.406: JP6.21 63.02,57.94 63.02,55.4 JP6.17 63.02,52.86 63.02,50.32 JP6.13 63.02,47.78 63.02,45.24 JP6.9 63.02,42.7 63.02,40.16 JP6.5 63.02,37.62 63.02,35.08 JP6.1 60.48,35.08 RN6.7
N$8
  Bottom 0.406: JP24.21 79.53,57.94 79.53,55.4 JP24.17 79.53,52.86 79.53,50.32 JP24.13 79.53,47.78 79.53,45.24 JP24.9 79.53,42.7 79.53,40.16 JP24.5 79.53,37.62 79.53,35.08 JP24.1 76.99,32.54 71.28,32.54 | 71.28,32.54 47.78,32.54 RN6.6 | JP26.3 72.55,40.16 71.28,38.89 71.28,32.54
N$9
  Bottom 0.406: JP23.21 3.33,57.94 3.33,55.4 JP23.17 3.33,52.86 3.33,50.32 JP23.13 3.33,47.78 3.33,45.24 JP23.9 3.33,42.7 3.33,40.16 JP23.5 | JP23.5 3.33,37.62 3.33,35.08 JP23.1 5.87,32.54 32.54,32.54 RN6.2 | JP25.3 5.87,40.16 JP23.5
N$10
  Top 0.406: JP21.1 14.13,32.54 35.08,32.54 RN6.3
  Bottom 0.406: JP21.21 11.59,57.94 11.59,55.4 JP21.17 11.59,52.86 11.59,50.32 JP21.13 11.59,47.78 11.59,45.24 JP21.9 11.59,42.7 11.59,40.16 JP21.5 11.59,37.62 11.59,35.08 JP21.1
N$11
  Top 0.406: IC24.4 IC24.3
N$12  (via drill 0.6)
  Top 0.406: v88.27,45.4 IC24.6
  Bottom 0.406: IC24.6 v88.27,45.4
N$13
  Bottom 0.406: IC23.4 IC23.3
N$14  (via drill 0.6)
  Top 0.406: v96.52,28.89 97.16,28.26 98.74,28.26 99.38,27.62 99.38,3.49 98.74,2.86 95.41,2.86 94.3,3.97 94.3,4.76 93.98,5.08 93.98,5.56 93.82,5.71 IC25.1
  Bottom 0.406: IC23.5 89.53,42.23 87,44.77 IC23.8 85.47,48.74 82.23,48.74 81.44,47.94 81.44,36.67 82.23,35.88 83.5,35.88 86.36,33.02 IC26.1 86.36,30.96 87.79,29.53 90.33,29.53 91.12,28.73 96.36,28.73 v96.52,28.89
N$15
  Bottom 0.406: JP30.3 JP29.2
N$16
  Bottom 0.406: JP30.5 JP29.3
N$17
  Bottom 0.406: JP30.7 JP29.4
N$18  (via drill 0.3 pad 0.61)
  Top 0.254: C2/JTAG.5 41.96,74.93 43.85,74.93 44.7,74.08 C4.1 C1.1 49.78,74.08 50.2,73.66 v50.2,68.83 | R4.2 62.64,66.98 | 62.64,66.98 61.8,66.98 R5.2 | v62.64,65.79 62.64,66.98
  Bottom 0.254: v50.2,68.83 50.2,66.04 50.7,65.53 62.39,65.53 v62.64,65.79
N$19
  Top 0.254: LED1.A 39.59,90.02 R1.2
N$20  (via drill 0.3 pad 0.61)
  Top 0.254: v65.44,65.53 65.44,66.92 | 65.44,66.92 R4.1 | 65.44,66.92 65.44,68.07 65.18,68.33 v64.93,68.33 | v59.34,68.58 59.34,69.87 IC1.13
  Bottom 0.254: C2/JTAG.7 40.67,71 41.81,69.85 45.12,69.85 46.13,68.83 46.13,65.79 46.9,65.02 64.93,65.02 v65.44,65.53 | v64.93,68.33 62.39,68.33 60.87,66.8 58.33,66.8 57.82,67.31 57.82,68.33 58.07,68.58 v59.34,68.58
N$21  (via drill 0.3 pad 0.61)
  Top 0.254: C2/JTAG.4 43.22,76.08 44.1,76.96 v52.74,76.96 | IC1.14 59.88,69.1 59.9,69.34 59.9,71.17 60.61,71.88 60.61,73.15 v60.36,73.41
  Bottom 0.254: v52.74,76.96 58.07,76.96 59.09,75.95 59.09,73.91 59.59,73.41 v60.36,73.41
N$22
  Top 0.254: Q1.3 92.39,72.67 93.38,73.66 93.38,75.44 93.89,75.95 96.91,75.95 CTRL.2
N$23  (via drill 0.3 pad 0.61)
  Top 0.406: v92.61,78.23 90.58,76.2 L1.1
  Bottom 0.406: CTRL.4 95.36,80.97 v92.61,78.23
N$24
  Bottom 0.406: JP13.21 19.68,26.04 19.68,23.5 JP13.17 19.68,20.95 19.68,18.41 JP13.13 19.68,15.88 19.68,13.34 JP13.9 19.68,10.79 19.68,8.26 JP13.5 | JP13.5 19.68,5.71 19.68,3.17 JP13.1 | RN2.4 38.1,5.08 22.86,5.08 JP13.5
N$25
  Top 0.406: JP15.1 13.97,0.64 34.92,0.64 RN2.3
  Bottom 0.406: JP15.21 11.43,26.04 11.43,23.5 JP15.17 11.43,20.95 11.43,18.41 JP15.13 11.43,15.88 11.43,13.34 JP15.9 11.43,10.79 11.43,8.26 JP15.5 11.43,5.71 11.43,3.17 JP15.1
N$26
  Bottom 0.406: JP17.21 3.17,26.04 3.17,23.5 JP17.17 3.17,20.95 3.17,18.41 JP17.13 3.17,15.88 3.17,13.34 JP17.9 3.17,10.79 3.17,8.26 JP17.5 | JP17.5 3.17,5.71 3.17,3.17 JP17.1 5.71,0.64 32.38,0.64 RN2.2 | JP19.3 5.71,8.26 JP17.5
N$27
  Top 0.406: RN2.5 45.09,0.64 68.58,0.64 JP16.1 71.12,3.17 71.12,5.71 JP16.5
  Bottom 0.406: JP16.21 71.12,26.04 71.12,23.5 JP16.17 71.12,20.95 71.12,18.41 JP16.13 71.12,15.88 71.12,13.34 JP16.9 71.12,10.79 71.12,8.26 JP16.5
N$28
  Top 0.406: JP9.1 RN4.2
N$29
  Top 0.406: JP11.13 27.94,20.95 27.94,18.41 JP11.9
  Bottom 0.406: JP11.9 27.94,15.88 27.94,13.34 JP11.5 | JP11.5 27.94,10.79 27.94,8.26 JP11.1 | RN4.3 32.38,12.06 JP11.5
N$30
  Bottom 0.406: JP12.13 54.61,20.95 54.61,18.41 JP12.9 54.61,15.88 54.61,13.34 JP12.5 54.61,10.79 54.61,8.26 JP12.1 51.44,5.08 49.53,5.08 RN4.7
N$31
  Bottom 0.406: JP10.1 RN4.5
N$32
  Bottom 0.406: JP14.21 62.87,26.04 62.87,23.5 JP14.17 62.87,20.95 62.87,18.41 JP14.13 62.87,15.88 62.87,13.34 JP14.9 62.87,10.79 62.87,8.26 JP14.5 62.87,5.71 62.87,3.17 JP14.1 60.33,3.17 RN2.7
N$33
  Bottom 0.406: JP18.21 79.38,26.04 79.38,23.5 JP18.17 79.38,20.95 79.38,18.41 JP18.13 79.38,15.88 79.38,13.34 JP18.9 79.38,10.79 79.38,8.26 JP18.5 79.38,5.71 79.38,3.17 JP18.1 76.83,0.64 71.12,0.64 | 71.12,0.64 47.62,0.64 RN2.6 | JP20.3 72.39,8.26 71.12,6.99 71.12,0.64
N$34
  Top 0.406: JP30.9 13.34,93.19 18.41,93.19 19.68,91.92 27.3,91.92 29.84,89.38 JP29.12
N$35
  Top 0.406: JP30.11 15.88,90.65 26.04,90.65 27.3,89.38 JP29.11
N$36
  Bottom 0.406: JP29.10 24.77,89.38 23.5,90.65 22.23,90.65 18.41,94.46 JP30.14
N$37
  Bottom 0.406: JP30.12 15.24,94.46 16.51,93.19 17.78,93.19 19.68,91.28 JP29.8
N$38
  Bottom 0.406: JP30.6 8.26,93.19 10.16,93.19 10.79,92.55 10.79,91.28 11.43,90.65 13.34,90.65 14.61,89.38 JP29.6
N$39
  Bottom 0.406: JP30.10 13.34,93.19 15.24,93.19 15.88,92.55 15.88,91.28 17.14,90.01 JP29.7
N$40
  Bottom 0.406: JP30.8 10.79,95.73 19.05,95.73 22.86,91.92 24.13,91.92 25.4,90.65 31.11,90.65 32.38,89.38 JP29.13
N$41
  Bottom 0.406: JP32.3 JP31.2
N$42
  Bottom 0.406: JP32.5 JP31.3
N$43
  Bottom 0.406: JP32.7 JP31.4
N$44
  Top 0.406: JP32.9 13.18,70.48 18.26,70.48 19.53,69.22 27.15,69.22 29.69,66.67 JP31.12
N$45
  Top 0.406: JP32.11 15.72,67.94 25.88,67.94 27.15,66.67 JP31.11
N$46
  Bottom 0.406: JP31.10 24.61,66.67 23.34,67.94 22.07,67.94 18.26,71.75 JP32.14
N$47
  Bottom 0.406: JP32.12 15.08,71.75 16.35,70.48 17.62,70.48 19.53,68.58 JP31.8
N$48
  Bottom 0.406: JP32.6 8.1,70.48 10,70.48 10.64,69.85 10.64,68.58 11.27,67.94 13.18,67.94 14.45,66.67 JP31.6
N$49
  Bottom 0.406: JP32.10 13.18,70.48 15.08,70.48 15.72,69.85 15.72,68.58 16.99,67.31 JP31.7
N$50
  Bottom 0.406: JP32.8 10.64,73.03 18.89,73.03 22.7,69.22 23.97,69.22 25.24,67.94 30.96,67.94 32.23,66.67 JP31.13
N$51
  Bottom 0.406: JP34.3 JP33.2
N$52
  Bottom 0.406: JP34.5 JP33.3
N$53
  Bottom 0.406: JP34.7 JP33.4
N$54
  Top 0.406: JP34.9 13.34,81.92 18.41,81.92 19.68,80.64 27.3,80.64 29.84,78.11 JP33.12
N$55
  Top 0.406: JP34.11 15.88,79.38 26.04,79.38 27.3,78.11 JP33.11
N$56
  Bottom 0.406: JP33.10 24.77,78.11 23.5,79.38 22.23,79.38 18.41,83.19 JP34.14
N$57
  Bottom 0.406: JP34.12 15.24,83.19 16.51,81.92 17.78,81.92 19.68,80.01 JP33.8
N$58
  Bottom 0.406: JP34.6 8.26,81.92 10.16,81.92 10.79,81.28 10.79,80.01 11.43,79.38 13.34,79.38 14.61,78.11 JP33.6
N$59
  Bottom 0.406: JP34.10 13.34,81.92 15.24,81.92 15.88,81.28 15.88,80.01 17.14,78.74 JP33.7
N$60
  Bottom 0.406: JP34.8 10.79,84.45 19.05,84.45 22.86,80.64 24.13,80.64 25.4,79.38 31.11,79.38 32.38,78.11 JP33.13
RD
  Top 0.406: IC24.2 93.34,46.04 94.61,44.77 JP28.18
RESET
  Top 0.254: Q1.1 71.75,73.62 70.77,72.64 70.77,71.12 70.26,70.61 65.69,70.61 64.17,72.14 64.17,75.69 63.91,75.95 57.91,75.95 IC1.3
SEN1
  Top 0.406: JP19.1 6.67,1.59 5.71,0.64 1.27,0.64 0.64,1.27 0.64,3.17 JP17.4
  Bottom 0.406: JP17.4 0.64,5.71 0.64,8.26 JP17.8 0.64,10.79 0.64,13.34 JP17.12 0.64,15.88 0.64,18.41 JP17.16 0.64,20.95 0.64,23.5 JP17.20 0.64,26.04 0.64,27.94 1.27,28.57 33.02,28.57 33.66,27.94 33.66,26.04 JP8.1 32.38,24.13 RN5.2
SEN2
  Top 0.406: JP15.20 8.89,26.04 8.89,27.94 9.53,28.57 33.02,28.57 33.66,27.94 33.66,26.04 JP8.3
  Bottom 0.406: JP15.20 8.89,23.5 8.89,20.95 JP15.16 8.89,18.41 8.89,15.88 JP15.12 8.89,13.34 8.89,10.79 JP15.8 8.89,8.26 8.89,5.71 JP15.4 | JP8.3 34.92,24.13 RN5.3
SEN3
  Bottom 0.406: JP8.7 41.27,23.5 41.27,20.95 40.64,20.32 39.37,20.32 RN3.3 JP9.4
SEN4
  Bottom 0.406: JP14.4 60.33,5.71 60.33,8.26 JP14.8 60.33,10.79 60.33,13.34 JP14.12 60.33,15.88 60.33,18.41 JP14.16 60.33,20.95 60.33,23.5 JP14.20 57.78,26.04 43.81,26.04 JP8.9 RN5.5
SEN5
  Bottom 0.406: JP12.4 52.07,10.79 52.07,13.34 JP12.8 52.07,15.88 52.07,18.41 JP12.12 46.35,19.68 | JP8.11 46.35,23.5 46.35,19.68 | 46.35,19.68 RN3.6
SEN6
  Top 0.406: JP13.20 19.68,26.04 28.57,26.04 31.11,23.5 35.56,23.5 36.2,24.13 36.2,26.04 | 36.2,26.04 JP8.4 | RN5.4 38.73,22.86 38.73,25.4 38.1,26.04 36.2,26.04
  Bottom 0.406: JP13.20 17.14,23.5 17.14,20.95 JP13.16 17.14,18.41 17.14,15.88 JP13.12 17.14,13.34 17.14,10.79 JP13.8 17.14,8.26 17.14,5.71 JP13.4
SEN7
  Bottom 0.406: JP11.4 25.4,10.79 25.4,13.34 JP11.8 25.4,15.88 25.4,18.41 JP11.12 27.94,18.41 29.84,18.41 31.11,19.68 34.92,19.68 | 34.92,19.68 37.47,19.68 38.73,20.95 38.73,26.04 JP8.6 | RN3.2 34.92,19.68
SEN8
  Top 0.406: JP8.10 41.27,26.04 41.27,19.68 RN3.4 41.27,17.14 43.81,17.14 JP10.4
SEN9
  Top 0.406: JP16.20 63.5,28.57 46.35,28.57 JP8.12 43.81,26.04 43.81,19.68 RN3.5
  Bottom 0.406: JP16.20 68.58,23.5 68.58,20.95 JP16.16 68.58,18.41 68.58,15.88 JP16.12 68.58,13.34 68.58,10.79 JP16.8 68.58,8.26 68.58,5.71 JP16.4
SEN10
  Top 0.406: JP8.14 46.35,26.04 46.35,22.86 RN5.6
  Bottom 0.406: JP8.14 48.9,28.57 71.75,28.57 JP18.20 76.83,23.5 76.83,20.95 JP18.16 76.83,18.41 76.83,15.88 JP18.12 76.83,13.34 76.83,10.79 JP18.8 76.83,8.26 76.83,5.71 JP18.4 74.3,3.17 JP20.1
SEN11
  Top 0.406: JP25.1 6.83,33.5 5.87,32.54 1.43,32.54 0.79,33.18 0.79,35.08 JP23.4
  Bottom 0.406: JP23.4 0.79,37.62 0.79,40.16 JP23.8 0.79,42.7 0.79,45.24 JP23.12 0.79,47.78 0.79,50.32 JP23.16 0.79,52.86 0.79,55.4 JP23.20 0.79,57.94 0.79,59.85 1.43,60.48 33.18,60.48 33.81,59.85 33.81,57.94 JP1.1 32.54,56.04 RN9.2
SEN12
  Top 0.406: JP21.20 9.05,57.94 9.05,59.85 9.68,60.48 33.18,60.48 33.81,59.85 33.81,57.94 JP1.3
  Bottom 0.406: JP21.20 9.05,55.4 9.05,52.86 JP21.16 9.05,50.32 9.05,47.78 JP21.12 9.05,45.24 9.05,42.7 JP21.8 9.05,40.16 9.05,37.62 JP21.4 | JP1.3 35.08,56.04 RN9.3
SEN13
  Top 0.406: JP7.20 19.84,57.94 28.73,57.94 31.27,55.4 35.72,55.4 36.35,56.04 36.35,57.94 | 36.35,57.94 JP1.4 | RN9.4 38.89,54.77 38.89,57.31 38.26,57.94 36.35,57.94
  Bottom 0.406: JP7.20 17.3,55.4 17.3,52.86 JP7.16 17.3,50.32 17.3,47.78 JP7.12 17.3,45.24 17.3,42.7 JP7.8 17.3,40.16 17.3,37.62 JP7.4
SEN14
  Bottom 0.406: JP4.4 25.56,42.7 25.56,45.24 JP4.8 25.56,47.78 25.56,50.32 JP4.12 28.1,50.32 30,50.32 31.27,51.59 35.08,51.59 | 35.08,51.59 37.62,51.59 38.89,52.86 38.89,57.94 JP1.6 | RN7.2 35.08,51.59
SEN15
  Top 0.406: JP1.10 41.43,57.94 41.43,51.59 RN7.4 41.43,49.05 43.97,49.05 JP3.4
SEN16
  Top 0.406: JP22.20 63.66,60.48 46.51,60.48 JP1.12 43.97,57.94 43.97,51.59 RN7.5
  Bottom 0.406: JP22.20 68.74,55.4 68.74,52.86 JP22.16 68.74,50.32 68.74,47.78 JP22.12 68.74,45.24 68.74,42.7 JP22.8 68.74,40.16 68.74,37.62 JP22.4
SEN17
  Top 0.406: JP1.14 46.51,57.94 46.51,54.77 RN9.6
  Bottom 0.406: JP1.14 49.05,60.48 71.91,60.48 JP24.20 76.99,55.4 76.99,52.86 JP24.16 76.99,50.32 76.99,47.78 JP24.12 76.99,45.24 76.99,42.7 JP24.8 76.99,40.16 76.99,37.62 JP24.4 74.45,35.08 JP26.1
SEN18
  Bottom 0.406: JP1.7 41.43,55.4 41.43,52.86 40.8,52.23 39.53,52.23 RN7.3 JP2.4
SEN19
  Bottom 0.406: JP6.4 60.48,37.62 60.48,40.16 JP6.8 60.48,42.7 60.48,45.24 JP6.12 60.48,47.78 60.48,50.32 JP6.16 60.48,52.86 60.48,55.4 JP6.20 57.94,57.94 43.97,57.94 JP1.9 RN9.5
SEN20
  Bottom 0.406: JP5.4 52.23,42.7 52.23,45.24 JP5.8 52.23,47.78 52.23,50.32 JP5.12 46.51,51.59 | JP1.11 46.51,55.4 46.51,51.59 | 46.51,51.59 RN7.6
SF1
  Top 0.254: SEMIFILAS.1 79.18,88.43 RN1.2 79.12,86.58 74.83,82.3 64.7,82.3 64.39,81.99 64.39,81.39 64.39,81.37 IC1.38
SF2
  Top 0.254: SEMIFILAS.2 81.72,88.43 RN1.3 81.44,88.15 81.44,86.36 76.87,81.79 66.2,81.79 64.89,80.47 IC1.37
SF3
  Top 0.254: SEMIFILAS.3 84.26,88.43 RN1.4 83.98,88.15 83.98,86.36 78.9,81.28 67.22,81.28 66.2,80.26 66.2,77.1 IC1.36
SF4
  Top 0.254: SEMIFILAS.4 86.8,88.43 RN1.5 86.52,88.15 86.52,86.36 80.93,80.77 68.74,80.77 68.23,80.26 68.23,76.71 67.94,76.42 IC1.35
SF5
  Top 0.254: SEMIFILAS.5 89.34,88.43 RN1.6 89.06,88.15 89.06,84.33 85,80.26 69.25,80.26 68.74,79.76 68.74,76.2 68.46,75.92 IC1.34
SF6
  Top 0.254: SEMIFILAS.6 91.88,88.43 RN1.7 91.6,88.15 91.6,84.33 87.03,79.76 69.75,79.76 69.25,79.25 69.25,75.69 68.97,75.42 IC1.33
SF7
  Top 0.254: SEMIFILAS.7 94.42,88.43 RN1.8 94.14,88.15 94.14,84.33 89.06,79.25 70.26,79.25 69.75,78.74 69.75,75.18 69.49,74.92 IC1.32
SF8
  Top 0.254: SEMIFILAS.8 96.96,88.43 RN1.9 96.68,88.15 96.68,84.33 91.09,78.74 70.77,78.74 70.26,78.23 70.26,74.68 70,74.42 IC1.31
VCC  (via drill 0.6)
  Top 0.406: 99.38,38.42 97.31,38.42 96.68,39.05 96.62,39.05 | 99.38,38.42 99.38,48.58 JP28.20 | IC25.16 87.1,5.61 88.98,3.73 | 88.98,3.73 89.22,3.49 92.08,3.49 v93.03,4.45 | C8.1 88.8,3.55 88.98,3.73 | 96.62,39.05 91.34,39.05 C10.1 | 96.62,39.05 IC24.14 | 99.38,38.42 99.38,31.27 98.9,30.8 97,30.8 95.25,29.05 IC4.16 95.25,22.38 v94.61,21.43 C9.1 | v94.93,5.71 94.93,7.78 95.89,8.73 v95.89,10.95
  Bottom 0.406: IC23.14 95.47,47.21 JP28.20 | v93.03,4.45 93.24,4.66 IC3.16 v94.93,5.71 | IC26.16 86.36,21.27 87.63,20 93.5,20 94.46,21.27 v94.61,21.43 95.09,20.8 95.09,11.91 95.89,11.11 v95.89,10.95
VDD  (via drill 0.3 pad 0.61)  (1 unrouted)
  Top 0.254: C3.1 C6.1 53.77,72.64 55.02,72.64 55.25,72.42 56.29,72.42 | 56.29,72.42 IC1.10 57.91,72.39 59.09,72.39 59.34,72.14 59.34,71.37 58.58,70.61 58.58,68.33 59.86,67.04 R5.1 | v56.29,72.9 56.29,72.42
  Top 0.406: R1.1 41.58,91.93 42.07,91.44 44.61,91.44 47.15,88.9 47.15,83.57 44.86,81.28 42.32,81.28 40.57,79.53 C2/JTAG.1
  Bottom 0.254: 41.05,80.01 41.81,80.77 44.61,80.77 45.12,80.26 45.12,76.2 45.62,75.69 55.53,75.69 56.29,74.93 v56.29,72.9
WR
  Top 0.254: JP28.19 98.11,47.21
  Top 0.406: IC24.1 98.11,47.21

## Text on the board
tPlace: Placa sensores Amebot | v1.0 AntonioVillena 21/02/2015 | Placa sensores Amebot | v1.0 AntonioVillena 21/02/2015
tDocu: PS/2 internal adapter / (C)2006-2015 McLeod/IdeaFix / http://www.zxprojects.com | FAILSAFE